# Altium PCB UART_TO_SPI.PcbDoc
Units mm, origin at the board's own origin, x right, y up, seen from the top; angles counter-clockwise.
Board outline 35 x 19 mm, 2 copper layers (Top Layer, Bottom Layer); 8 components, 20 nets, 53 pads, 14 vias.
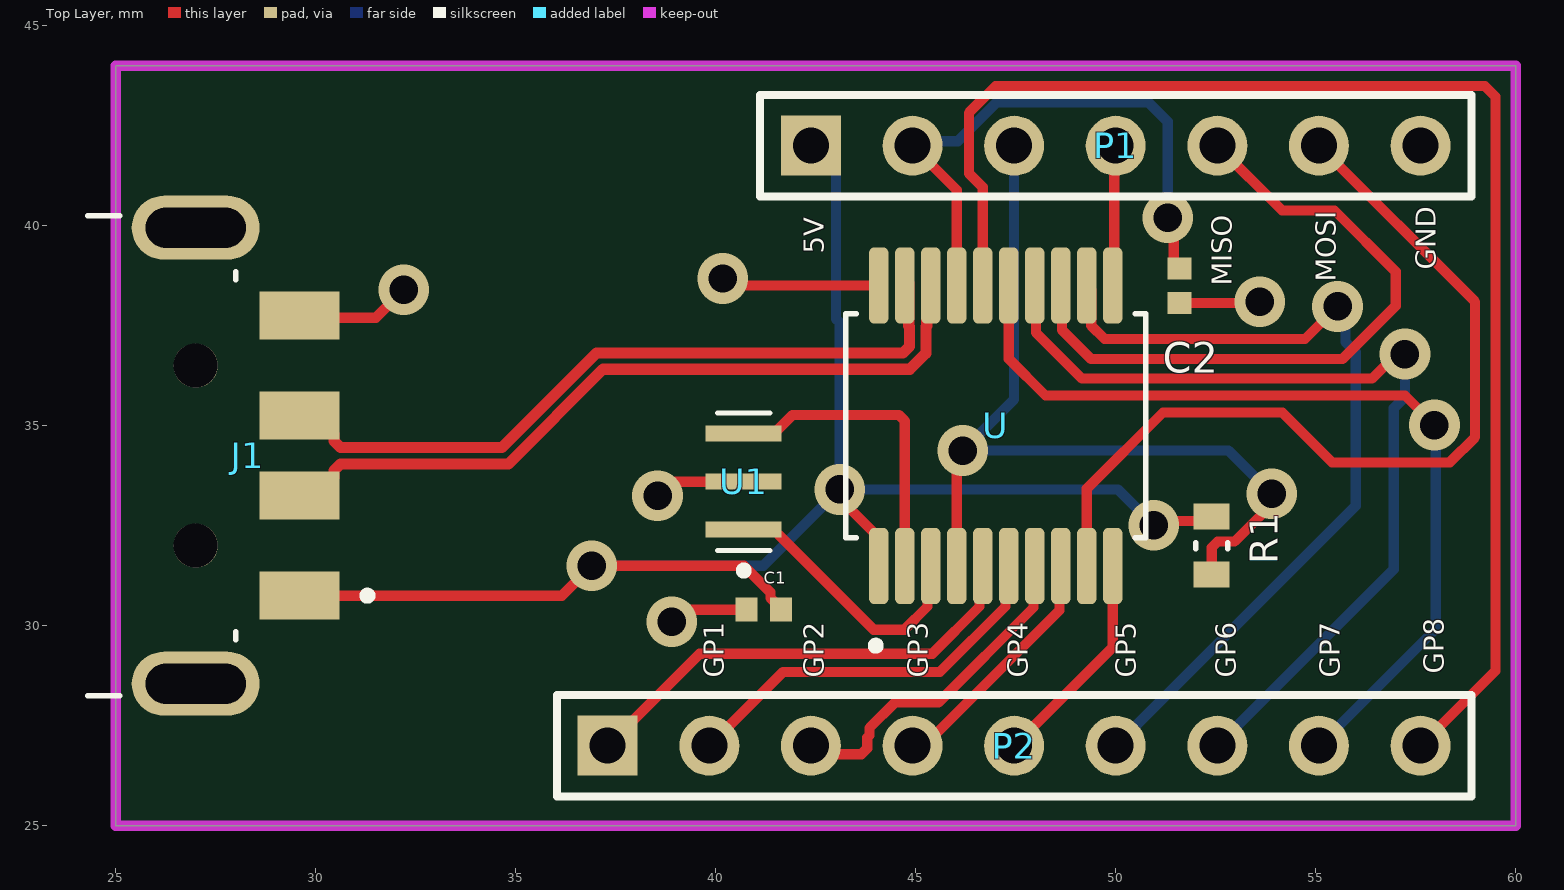
[diagram p0: Top Layer view]
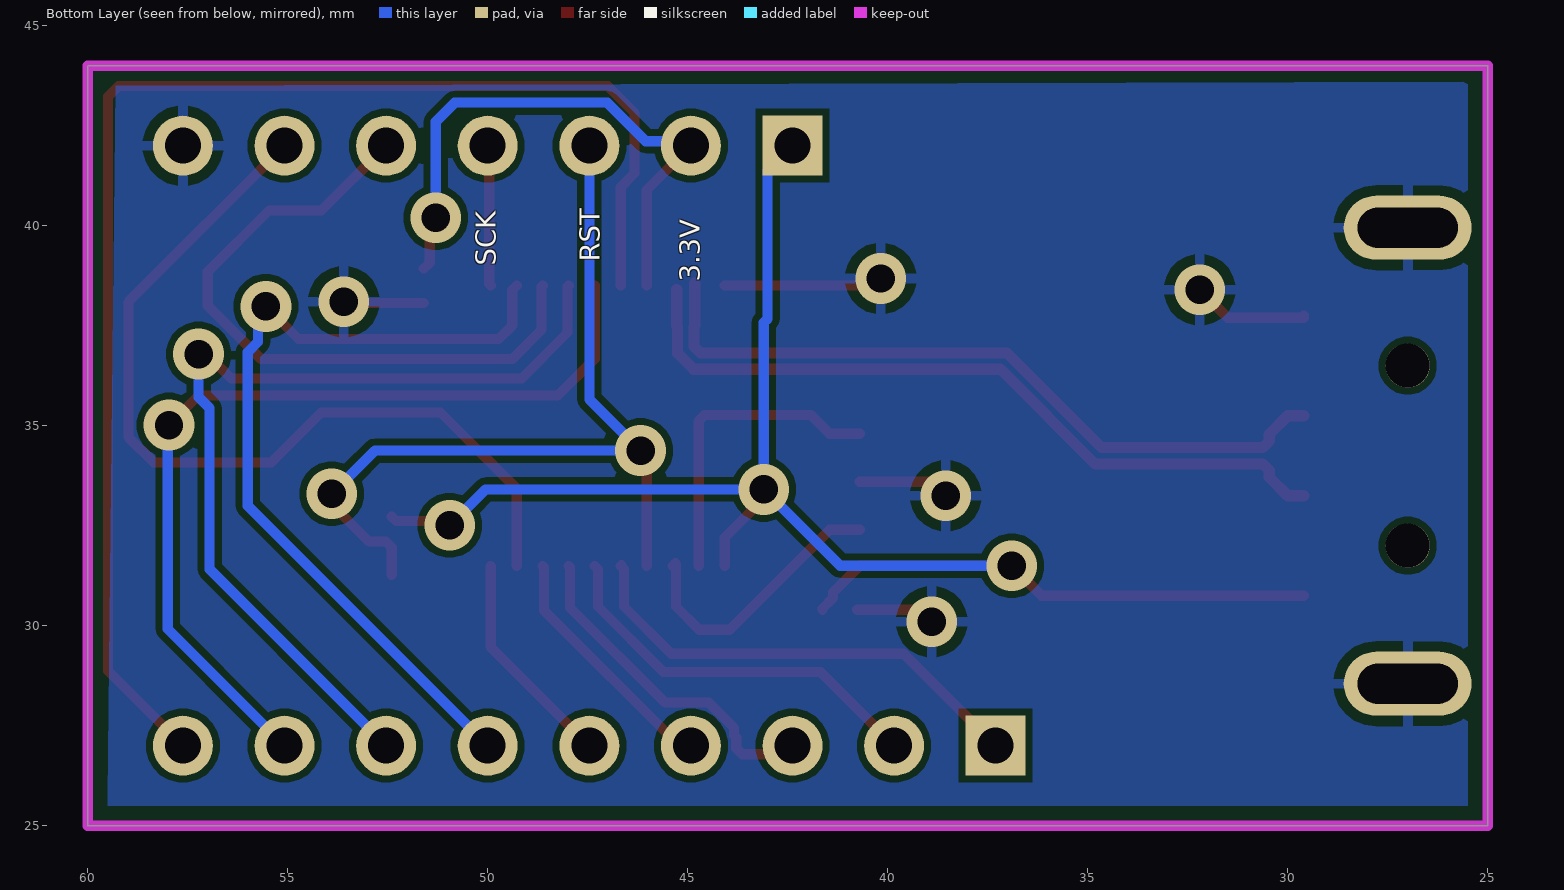
[diagram p1: Bottom Layer view, seen from below]

## Layer stack, top to bottom
Top Solder: solder mask 0.0102, Solder Resist, Dk 3.5
Top Layer: signal copper 0.0356
Dielectric 1: dielectric 0.32, FR-4, Dk 4.8
Bottom Layer: signal copper 0.0356
Bottom Solder: solder mask 0.0102, Solder Resist, Dk 3.5

## Board outline
25,25 60,25 60,44 25,44

## Design rules (kind name [scope] priority, off if disabled: settings)
Clearance diff_pair [(InDifferentialPairClass('All Differential Pairs'))] p1: gap=0.126 ignorepadtopadclearanceinfootprint=FALSE
Clearance [All] p2: gap=0.169 ignorepadtopadclearanceinfootprint=FALSE
DiffPairsRouting [All] p1: maxlimit=0.127 minlimit=0.127 mostfreqgap=0.127 toplayer_minwidth=0.279 toplayer_maxwidth=0.279 toplayer_prefwidth=0.279 bottomlayer_minwidth=0.279 bottomlayer_maxwidth=0.279 bottomlayer_prefwidth=0.279 impedanceprofiledriven=TRUE impedanceprofileid={DA2C60F6-7091-4660-93FC-26B1713A3544} impedanceprofilevalue=90.000000 maxuncoupledlength=12.7
MinimumSolderMaskSliver [All] p1: minsoldermaskwidth=0.12
PolygonConnect [All] p1: connectstyle=Relief reliefconductorwidth=0.254 reliefentries=4 polygonreliefangle="90 Angle" airgapwidth=0.254
RoutingVias [All] p1: holewidth=0.711 width=1.27 viastyle="Through Hole" minholewidth=0.711 minwidth=1.27 maxholewidth=0.711 maxwidth=1.27
SilkToSolderMaskClearance [IsPad] p1: minsilkscreentomaskgap=0.135 clearancetoexposedcopper=TRUE
SolderMaskExpansion [All] p1: expansion=0.102 istentingtop=FALSE
Width [All] p1: maxlimit=0.254 minlimit=0.254 preferedwidth=0.254
27 further rules are at their usual default settings.

## Classes and differential pairs
differential pair USB: +USB_P -USB_N

## Components (designator, comment, footprint, x,y, rotation, side; value= is the part's Value field where it differs from the comment)
C1 "100N" CAPC1005X55N 41.2,30.4 r180 top
C2 "100N" CAPC1005X55N 51.6,38.5 r270 top
J1 "1-1734028-1" TE_1-1734028-1 27,34.25 r270 top
P1 "Header 7" HDR1X7 42.38,42 r0 top
P2 "Header 9" HDR1X9 37.3,27 r0 top
R1 "390" RES_ERJ3EKF3900V 52.4,32 r90 top
U "MCP2210-I/SS" SOP65P780X200-20N 47,35 r90 top
U1 "CSTNE12M0G550000R0" OSC_CSTNE12M0G550000R0 40.7,33.6 r90 top

## Footprints (in the part's own frame and the unit in brackets; to place one, negate y for a bottom-side part, rotate by r counter-clockwise, add the part's x,y. Pads: shape width x height; smd on the part's side, far side on the other; paste and mask are expansions set on the pad)
CAPC1005X55N [mm]
  rect 0.54x0.6 smd: 1(-0.432,0) 2(0.432,0)
  body extent -0.5,-0.25 0.5,0.25, height 0.55
HDR1X7 [mm] "Connector; Header; 7 Position"
  rect 1.5x1.5 hole 0.9: 1(0,0)
  round 1.5 hole 0.9: 2(2.54,0) 3(5.08,0) 4(7.62,0) 5(10.16,0) 6(12.7,0) 7(15.24,0)
  silkscreen extent -1.27,-1.27 16.51,1.27
HDR1X9 [mm] "Connector; Header; 9 Position"
  rect 1.5x1.5 hole 0.9: 1(0,0)
  round 1.5 hole 0.9: 2(2.54,0) 3(5.08,0) 4(7.62,0) 5(10.16,0) 6(12.7,0) 7(15.24,0) 8(17.78,0) 9(20.32,0)
  silkscreen extent -1.27,-1.27 21.59,1.27
OSC_CSTNE12M0G550000R0 [mm]
  rect 0.4x1.9 smd: 1(-1.2,0) 2(0,0) 3(1.2,0)
  silkscreen extent -2.32,-0.65 1.72,0.65, body extent -1.6,-0.65 1.6,0.65, height 0.8
RES_ERJ3EKF3900V [mm]
  rect 0.65x0.9 smd: 1(-0.725,0) 2(0.725,0)
  silkscreen extent -0.08,-0.4 0.08,0.4
SOP65P780X200-20N [mm]
  rrect50% 1.9x0.48 smd: 1(-3.505,2.925) 2(-3.505,2.275) 3(-3.505,1.625) 4(-3.505,0.975) 5(-3.505,0.325) 6(-3.505,-0.325) 7(-3.505,-0.975) 8(-3.505,-1.625) 9(-3.505,-2.275) 10(-3.505,-2.925) 11(3.505,-2.925) 12(3.505,-2.275) 13(3.505,-1.625) 14(3.505,-0.975) 15(3.505,-0.325) 16(3.505,0.325) 17(3.505,0.975) 18(3.505,1.625) 19(3.505,2.275) 20(3.505,2.925)
  silkscreen extent -5.6,-3.75 2.8,3.75, body extent -4.1,-3.75 4.1,3.75, height 2.01
TE_1-1734028-1 [mm]
  rect 1.2x2 smd: 1(3.5,2.6) 2(1,2.6) 3(-1,2.6) 4(-3.5,2.6)
  oval 1.6x3.2 hole 1 slot 2.5 at 90 deg: S1(-5.7,0) S2(5.7,0)
  round 1.1 hole 1.1 unplated: ""(-2.25,0) ""(2.25,0)
  silkscreen extent -6,-2.7 6,4.39, body extent -6.55,-17.54 6.35,3.31, height 3.25

## Part data
C1 C2: library part GRM155R71C104KA88D, "SMD Capacitor X7R_EIA_ with Capacitance: 0.10uF Tol. 10%. Rated Voltage: 16Vdc", Package="1005 Taiyo Yuden", MF=Murata, MP=GRM155R71C104KA88D, SnapEDA_Link=https://www.snapeda.com/parts/GRM155R71C104KA88D/Murata%20Electronics%20North%20America/view-part/4750/?ref=snap
J1: "Conn USB 2.0 Type A PL 4 POS Solder RA SMD 4 Terminal 1 Port T/R", Package=None, Centerline_Pitch="2 mm[.078 in]", Digi-Key_Part_Number=A122942CT-ND, Digi-Key_Purchase_URL=https://www.digikey.hk/product-detail/en/te-connectivity-amp-connectors/1-1734028-1/A122942CT-ND/5419414?utm_source=snapeda&utm_medium=aggregator&utm_campaign=symbol, MF="TE Connectivity", MP=1-1734028-1, Number_of_Positions=4, Product_Type=Connector, SnapEDA_Link=https://www.snapeda.com/parts/1-1734028-1/TE%20Connectivity%20AMP%20Connectors/view-part/889803/?ref=snap, TE_purchase_URL=https://www.te.com/usa-en/product-1-1734028-1.html?te_bu=Cor&te_type=disp&te_campaign=seda_glo_cor-seda-global-disp-prtnr-fy19-seda-model-bom-cta_sma-317_1&elqCampaignId=32493
P1: "Header, 7-Pin", LatestRevisionDate=17-Jul-2002, LatestRevisionNote="Re-released for DXP Platform.", Publisher="Altium Limited"
P2: "Header, 9-Pin", LatestRevisionDate=17-Jul-2002, LatestRevisionNote="Re-released for DXP Platform.", Publisher="Altium Limited"
R1: library part ERJ3EKF3900V, Package=None, Availability=Unavailable, MP=ERJ3EKF3900V, Price=None
U: "USB Bridge, USB to SPI USB 2.0 SPI Interface 20-SSOP", Package="SSOP-20 Microchip", Availability=Unavailable, MF=Microchip, MP=MCP2210-I/SS, Price=None, SnapEDA_Link=https://www.snapeda.com/parts/MCP2210-I/SS/Microchip/view-part/275317/?ref=snap
U1: "12MHz Ceramic Resonator Built in Capacitor 33pF Â±0.2% 30 Ohms -40Â°C ~ 85Â°C Surface Mount", Package="SMD-3 Murata", Availability=Good, Check_prices=https://www.snapeda.com/parts/CSTNE12M0G550000R0/Murata%20Electronics%20North%20America/view-part/2778735/?ref=eda, MF="Murata Electronics", MP=CSTNE12M0G550000R0, Price=None, Purchase-URL=https://pricing.snapeda.com/search/part/CSTNE12M0G550000R0/?ref=eda, SnapEDA_Link=https://www.snapeda.com/parts/CSTNE12M0G550000R0/Murata%20Electronics%20North%20America/view-part/2778735/?ref=snap

## Via types
v1: diameter 1.27, hole 0.711, Top Layer to Bottom Layer, 14 vias

## Nets (pads, with @x,y where several pads share a name; then routed paths per layer and width w, separated by ;. In a path a pad name is that pad's centre, name@x,y a point inside that pad or via, vN(x,y) a via of type N, cw(c..) or ccw(c..) an arc to the next point about the centre after c; other vN are vias at no path point)
3.3V: C2.1 P1.2 U.17 | length 14.8
  Top Layer w0.254: P1.2 46.025,40.895 U.17 ; v1(51.3,40.2) 51.45,40.05 51.45,39.075 51.593,38.932 C2.1
  Bottom Layer w0.254: P1.2 45.034,42.114 46.051,42.114 47.014,43.077 50.823,43.077 51.3,42.6 v1(51.3,40.2)
GND: C1.2 C2.2 J1.4 J1.S1 J1.S2 P1.7 U1.2 U.20 | length 13.2
  Top Layer w0.254: J1.4 29.6,37.7 31.5,37.7 v1(32.2,38.4) ; v1(38.548,33.248) 38.9,33.6 U1.2 ; v1(38.9,30.1) 39.2,30.4 C1.2 ; v1(40.176,38.68) 40.351,38.505 U.20 ; C2.2 53.568,38.068 v1(53.6,38.1)
GP0: P2.1 U.5 | length 11.8
  Top Layer w0.254: P2.1 39.6,29.3 45.412,29.3 46.592,30.48 46.592,31.412 U.5 U.5@46.653,31.517
GP1: P2.2 U.6 | length 9.9
  Top Layer w0.254: P2.2 41.686,28.846 45.608,28.846 47.242,30.48 47.242,31.412 U.6
GP2: P2.3 U.7 | length 8.5
  Top Layer w0.254: P2.3 42.591,26.789 43.64,26.789 43.789,26.938 43.789,27.203 43.843,27.257 43.843,27.446 44.474,28.077 45.566,28.077 47.946,30.457 47.946,31.466 U.7
GP3: P2.4 U.8 | length 6.2
  Top Layer w0.254: P2.4 45.207,27 48.596,30.389 48.596,31.466 U.8
GP4: P2.5 U.10 | length 5.5
  Top Layer w0.254: P2.5 49.925,29.465 U.10
GP5: P2.6 U.12 | length 21.3
  Top Layer w0.254: U.12 49.388,38.392 49.388,37.504 49.723,37.169 54.732,37.169 v1(55.547,37.984)
  Bottom Layer w0.254: P2.6 56,33 56,36.841 55.742,37.099 55.742,37.79 v1(55.547,37.984)
GP6: P2.7 U.14 | length 22.9
  Top Layer w0.254: U.14 48.004,38.476 48.004,37.331 49.158,36.177 56.405,36.177 57.019,36.791 v1(57.228,36.791)
  Bottom Layer w0.254: P2.7 56.952,31.412 56.952,35.437 57.228,35.713 v1(57.228,36.791)
GP7: P2.8 U.15 | length 22.4
  Top Layer w0.254: U.15 47.325,36.675 48.246,35.754 57.23,35.754 v1(57.968,35.016)
  Bottom Layer w0.254: P2.8 58,29.92 58,34.984 v1(57.968,35.016)
GP8: P2.9 U.16 | length 35
  Top Layer w0.254: U.16 46.675,40.963 46.329,41.309 46.329,42.821 47,43.492 58.774,43.492 59.226,43.492 59.492,43.226 59.492,28.872 P2.9
MISO: P1.5 U.13 | length 16.9
  Top Layer w0.254: U.13 48.654,38.476 48.654,37.399 49.387,36.666 55.666,36.666 57,38 57,38.851 55.47,40.381 54.159,40.381 P1.5
MOSI: P1.6 U.9 | length 22.1
  Top Layer w0.254: U.9 49.275,33.424 51.182,35.331 54.161,35.331 55.407,34.085 58.354,34.085 58.984,34.715 58.984,38.096 P1.6
NetU1_1: U1.1 U.3 | length 7
  Top Layer w0.254: U1.1 41.45,32.4 43.95,29.9 44.712,29.9 45.292,30.48 45.292,31.544 45.309,31.561 U.3
NetU1_3: U1.3 U.2 | length 7.9
  Top Layer w0.254: U1.3 41.45,34.8 41.921,35.271 44.576,35.271 44.725,35.123 U.2
RST: P1.3 R1.1 U.4 | length 22.1
  Top Layer w0.254: U.4 46.025,34.225 v1(46.178,34.378) ; R1.1 52.4,31.955 52.549,32.104 52.973,32.104 53.9,33.031 v1(53.9,33.3)
  Bottom Layer w0.254: v1(46.178,34.378) 52.822,34.378 v1(53.9,33.3) ; v1@46.189,34.389 47.46,35.66 P1.3
SCK: P1.4 U.11 | length 3.5
  Top Layer w0.254: U.11 49.962,38.542 49.962,41.962 P1.4
USB_N: J1.2 U.18 | length 18.8
  Top Layer w0.279: J1.2 30,33.25 30.461,33.711 30.461,33.884 30.624,34.047 30.855,34.047 34.821,34.047 37.187,36.413 44.852,36.413 45.253,36.814 45.253,37.477 45.274,37.499 U.18@45.274,38.404
USB_P: J1.3 U.19 | length 18.3
  Top Layer w0.279: J1.3 30,35.25 30.461,34.789 30.461,34.616 30.624,34.453 31.023,34.453 34.653,34.453 37.019,36.819 44.684,36.819 44.847,36.982 44.847,37.477 44.826,37.499 U.19@44.826,38.572
VDD: C1.1 J1.1 P1.1 R1.2 U.1 | length 40.9
  Top Layer w0.254: J1.1 36.15,30.75 v1(36.9,31.5) 40.7,31.5 41.365,30.835 41.365,30.697 41.632,30.43 C1.1 ; v1(43.1,33.409) 43.1,33.18 44.075,32.205 U.1 ; v1(50.95,32.51) 51.058,32.618 52.293,32.618 R1.2
  Bottom Layer w0.254: v1(36.9,31.5) 41.191,31.5 v1(43.1,33.409) ; P1.1 43.003,41.377 43.003,37.676 43.1,37.579 v1(43.1,33.409) ; v1(50.95,32.51) 50.051,33.409 v1(43.1,33.409)
pads on no net: J1.

## Polygon pours and split planes (outlines as drawn)
GND on Bottom Layer "NONET_L01_P-001" (solid, pour order 0): 25.5,43.6 25.5,25.5 59.5,25.5 59.5,25.7 59.3,43.5 25.6,43.6

## Keep-outs
Keep-Out Layer:
  the board outline again, w0.254

## Silkscreen, mask and mechanical layers (free items; w line width, h text height)
Top Overlay:
  text "5V" at 42.7,39.3 h0.5 r90
  text "GND" at 58,38.9 h0.5 r90
  text "MOSI" at 55.5,38.6 h0.5 r90
  text "MISO" at 52.9,38.5 h0.5 r90
  text "GP8" at 58.2,28.8 h0.5 r90
  text "GP1" at 40.2,28.7 h0.5 r90
  text "GP2" at 42.7,28.7 h0.5 r90
  text "GP3" at 45.3,28.7 h0.5 r90
  text "GP4" at 47.8,28.7 h0.5 r90
  text "GP5" at 50.5,28.7 h0.5 r90
  text "GP6" at 53,28.7 h0.5 r90
  text "GP7" at 55.6,28.7 h0.5 r90
Bottom Overlay:
  text "RST" at 47.2,39.1 h0.5 r270
  text "SCK" at 49.8,39 h0.5 r270
  text "3.3V" at 44.7,38.6 h0.5 r270

## Text inside footprints (layer, text, board x,y; h text height)
J1: Mechanical 13 "PCB EDGE" at 24.4,27.05 h0.75 r270